# EAGLE board neogeoscart (EAGLE 8.3.1)
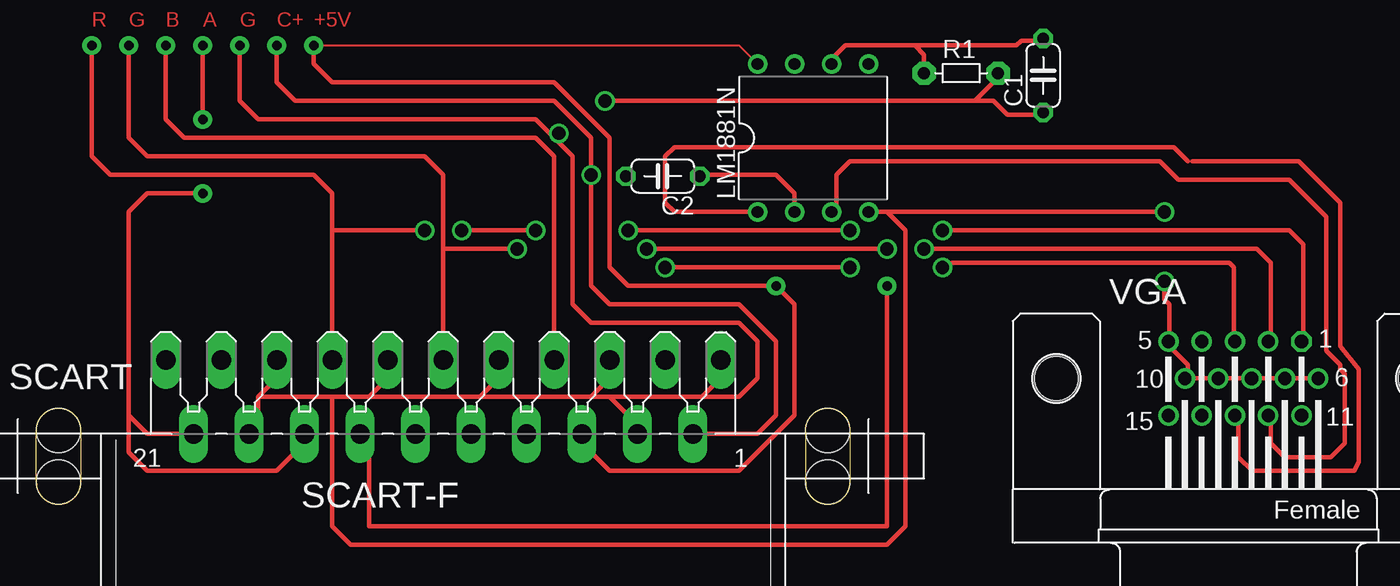
[diagram p0: board, top side]

Size 55.88 x 6.6 mm. Coordinates in mm from the lower left corner, seen from the top.
Copper layers (1*16): Top 0.035mm / dielectric 1.5mm / Bottom 0.035mm
Design rules "default": minimum track width 6mil, minimum drill 0.35mm, track to track 6mil, track to pad 6mil, pad to pad 6mil, via to via 6mil, smd to smd 6mil, copper to edge 40mil, drill to drill 6mil, minimum pad ring 10mil, minimum via ring 8mil, stop-mask expansion 4mil, vias tented up to drill 0mil, thermal gap 10mil

## Footprints (pad centres in the part's own frame; a part is rotated, then mirrored left to right if it is on the bottom)
C050-024X044 = drill 0.813 octagon: 1 -2.54,0; 2 2.54,0
DIL08-400 = drill 0.813 pad 1.3: 1 -3.81,-5.08; 2 -1.27,-5.08; 3 1.27,-5.08; 4 3.81,-5.08; 5 3.81,5.08; 6 1.27,5.08; 7 -1.27,5.08; 8 -3.81,5.08
R-5 = drill 0.813 pad 1.6 octagon: 1 -2.54,0; 2 2.54,0
SCART-F = drill 1.321 long: 1 19.05,5.08; 2 17.145,0; 3 15.24,5.08; 4 13.335,0; 5 11.43,5.08; 6 9.525,0; 7 7.62,5.08; 8 5.715,0; 9 3.81,5.08; 10 1.905,0; 11 0,5.08; 12 -1.905,0; 13 -3.81,5.08; 14 -5.715,0; 15 -7.62,5.08; 16 -9.525,0; 17 -11.43,5.08; 18 -13.335,0; 19 -15.24,5.08; 20 -17.145,0; 21 -19.05,5.08 | hole 3.023: 26.416,0.254; 26.416,-3.302; -26.416,0.254; -26.416,-3.302
HDF15H = drill 0.9 octagon: 1 4.329,2.54 | drill 0.9: 2 2.043,2.54; 3 -0.243,2.54; 4 -2.529,2.54; 5 -4.815,2.54; 6 5.472,0; 7 3.186,0; 8 0.9,0; 9 -1.386,0; 10 -3.672,0; 11 4.329,-2.54; 12 2.043,-2.54; 13 -0.243,-2.54; 14 -2.529,-2.54; 15 -4.815,-2.54 | hole 3: -12.5,0; 12.5,0

## Placement (x,y rotation side)
C1  0,1uF  [C050-024X044]  69.14,29.44 90 top  (outside the outline)
C2  0,1uF  [C050-024X044]  43.02,22.53 180 top  (outside the outline)
LM1881N  [DIL08-400]  53.34,25.15 0 top  (outside the outline)
R1  680k  [R-5]  63.5,29.59 0 top  (outside the outline)
SCART  [SCART-F]  27.94,4.83 0 top
VGA  [HDF15H]  82.55,8.64 0 top  (outside the outline)

## Library data of the parts
C1 C2 = rcl
LM1881N = avago
R1 = discrete
SCART = con-hirschmann
VGA = con-subd

## Nets
S$5: LM1881N.4
S$7: LM1881N.2
S$12: LM1881N.8
S$25: LM1881N.1
S$31: LM1881N.6

## Tracks (layer width: path | path; a pad name or v marks a point on that pad's centre or on a via)
S$1  (via drill 0.65 pad 1.3, 0.9 pad 1.3)
  Top 0.305: v3.81,31.5 3.81,23.88 5.08,22.61 19.05,22.61 20.32,21.34 20.32,18.8 | 20.32,18.8 20.32,9.91 | 20.32,18.8 v26.67,18.8
S$2  (via drill 0.65 pad 1.3, 0.9 pad 1.3)
  Top 0.305: v6.35,31.5 6.35,25.15 7.62,23.88 26.67,23.88 27.94,22.61 27.94,17.53 | 27.94,17.53 27.94,9.91 | 27.94,17.53 v33.02,17.53
S$3  (via drill 0.65 pad 1.3)
  Top 0.305: v8.89,31.5 8.89,26.42 10.16,25.15 34.29,25.15 35.56,23.88 35.56,9.91
S$4  (via drill 0.65 pad 1.3)
  other vias: 11.43,31.5
S$5  (via drill 0.65 pad 1.3, 0.9 pad 1.3)
  Top 0.305: LM1881N.4 58.42,20.07 | 15.24,4.83 15.24,7.37 | 15.24,7.37 16.51,8.64 | 15.24,7.37 20.32,7.37 | 20.32,7.37 22.86,7.37 | 22.86,7.37 24.13,8.64 | 22.86,7.37 30.48,7.37 | 30.48,7.37 31.75,8.64 | 30.48,7.37 38.1,7.37 | 38.1,7.37 39.37,8.64 | 38.1,7.37 39.37,7.37 | 39.37,7.37 40.64,6.1 | 39.37,7.37 45.72,7.37 | 45.72,7.37 46.99,8.64 | 45.72,7.37 48.26,7.37 49.53,8.64 49.53,11.18 48.26,12.45 38.1,12.45 36.83,13.72 36.83,23.88 34.29,26.42 15.24,26.42 13.97,27.69 v13.97,31.5 | 20.32,7.37 20.32,-1.52 21.59,-2.79 58.42,-2.79 59.69,-1.52 59.69,18.8 58.42,20.07 | 58.42,20.07 v77.47,20.07
S$6  (via drill 0.65 pad 1.3, 0.9 pad 1.3)
  Top 0.305: v16.51,31.5 16.51,28.96 17.78,27.69 35.56,27.69 38.1,25.15 v38.1,22.61 38.1,14.99 39.37,13.72 48.26,13.72 50.8,11.18 50.8,6.1 49.53,4.83 45.72,4.83
S$7
  Top 0.305: LM1881N.2 52.07,21.34 50.8,22.61 45.4,22.61
S$8
  Top 0.305: 87.63,8.64 78.74,8.64
S$9  (via drill 0.9 pad 1.3)
  Top 0.305: v29.21,18.8 30.48,18.8 v34.29,18.8
S$10  (via drill 0.65 pad 1.3)
  Top 0.305: v11.43,26.42 11.43,31.5
S$11  (via drill 0.65 pad 1.3)
  Top 0.305: 17.78,3.56 16.51,2.29 7.62,2.29 6.35,3.56 6.35,6.1 | 10.16,4.83 7.62,4.83 6.35,6.1 | 6.35,6.1 6.35,20.07 7.62,21.34 v11.43,21.34
S$12  (via drill 0.65 pad 1.3)
  Top 0.152: v19.05,31.5 48.26,31.5 LM1881N.8
  Top 0.305: 38.1,4.83 38.1,3.56 39.37,2.29 48.26,2.29 52.07,6.1 52.07,13.72 v50.8,14.99 40.64,14.99 39.37,16.26 39.37,25.15 35.56,28.96 20.32,28.96 19.05,30.23 v19.05,31.5
S$13  (via drill 0.65 pad 1.3)
  Top 0.305: 22.86,3.56 22.86,-1.52 58.42,-1.52 v58.42,14.99
S$14  (via drill 0.9 pad 1.3)
  Top 0.305: v40.64,18.8 v55.88,18.8
S$15  (via drill 0.9 pad 1.3)
  Top 0.305: v41.91,17.53 v58.42,17.53
S$16  (via drill 0.9 pad 1.3)
  Top 0.305: v43.18,16.26 v55.88,16.26
S$17  (via drill 0.9 pad 1.3)
  other vias: 62.23,16.26
S$18  (via drill 0.9 pad 1.3)
  other vias: 60.96,17.53
S$19  (via drill 0.9 pad 1.3)
  other vias: 62.23,18.8
S$20
  Top 0.305: 62.55,18.8 86.04,18.8 87,17.84 87,11.18 87.31,10.86
S$21
  Top 0.305: 84.77,10.86 84.77,16.57 83.82,17.53 61.28,17.53 60.96,17.21
S$22
  Top 0.305: 62.86,16.57 81.92,16.57 82.23,16.26 82.23,11.18 82.55,10.86
S$23  (via drill 0.9 pad 1.3)
  Top 0.305: 79.06,8.32 79.06,9.59 77.79,10.86 77.79,13.72 77.47,14.03 v77.47,15.3
S$24  (via drill 0.9 pad 1.3)
  other vias: 35.88,25.46
S$25
  Top 0.305: LM1881N.1 43.81,20.07 43.18,20.7 43.18,23.88 43.81,24.51 78.11,24.51 79.06,23.56
S$27
  Top 0.305: 82.23,5.78 82.55,5.46 82.55,3.24 83.5,2.29 90.49,2.29 90.8,2.92 90.8,9.27 89.53,10.86 89.53,20.7 86.68,23.56 79.38,23.56
S$28
  Top 0.305: 84.77,5.78 84.77,4.19 85.72,3.24 88.9,3.24 89.85,4.19 89.85,8.95 89.53,9.27 89.53,9.59 88.58,10.54 88.58,19.75 86.04,22.29 78.42,22.29 77.15,23.56 55.88,23.56 54.93,22.61 54.93,19.75
S$30  (via drill 0.9 pad 1.3)
  Top 0.305: v39.05,27.69 64.45,27.69 | 64.45,27.69 66.04,29.27 | 64.45,27.69 65.72,27.69 66.67,26.73 69.22,26.73
S$31
  Top 0.305: LM1881N.6 54.61,30.54 55.56,31.5 60.33,31.5 | 60.33,31.5 60.96,30.86 60.96,29.91 61.28,29.59 | 60.33,31.5 67.31,31.5 67.63,31.81 69.22,31.81

## Text on the board
Top: R | G | B | A | G | C+ | +5V